# EAGLE board MultiBoard (EAGLE 9.2.2)

Size 158.42 x 80 mm. Coordinates in mm from the lower left corner, seen from the top.
Outline: 0,0 158.42,0 158.42,80 0,80 0,0
Copper layers (1*16): Top 0.035mm / dielectric 1.5mm / Bottom 0.035mm
Design rules "default": minimum track width 6mil, minimum drill 0.35mm, track to track 6mil, track to pad 6mil, pad to pad 6mil, via to via 6mil, smd to smd 6mil, copper to edge 40mil, drill to drill 6mil, minimum pad ring 10mil, minimum via ring 8mil, stop-mask expansion 4mil, vias tented up to drill 0mil, thermal gap 10mil
Net classes: 0 default: width 0.254 mm, clearance 0.254 mm; 2 gnd: width 0.305 mm, drill 0.559 mm, clearance 0.254 mm; 3 usbvcc: width 0.508 mm, drill 0.61 mm, clearance 0.254 mm; 4 aref: width 0.406 mm, drill 0.61 mm, clearance 0.254 mm

## Footprints (pad centres in the part's own frame; a part is rotated, then mirrored left to right if it is on the bottom)
C0805 = smd 1.3 x 1.5: 1 -0.95,0; 2 0.95,0
SOD-123_MINI-SMA = smd 1.5 x 2.1: A 1.8,0; C -1.8,0
SO08 = smd 0.66 x 2.032: 1 -1.905,-3.073; 2 -0.635,-3.073; 3 0.635,-3.073; 4 1.905,-3.073; 5 1.905,3.073; 6 0.635,3.073; 7 -0.635,3.073; 8 -1.905,3.073
M0805 = smd 1.3 x 1.6: 1 -0.95,0; 2 0.95,0
R0402 = smd 0.6 x 0.7: 1 -0.5,0; 2 0.5,0
FE05-1 = drill 0.813 long: 1 -5.08,0; 2 -2.54,0; 3 0,0; 4 2.54,0; 5 5.08,0
DIL28-3 = drill 0.85 pad 1.422 long: 1 -16.51,-3.81; 2 -13.97,-3.81; 3 -11.43,-3.81; 4 -8.89,-3.81; 5 -6.35,-3.81; 6 -3.81,-3.81; 7 -1.27,-3.81; 8 1.27,-3.81; 9 3.81,-3.81; 10 6.35,-3.81; 11 8.89,-3.81; 12 11.43,-3.81; 13 13.97,-3.81; 14 16.51,-3.81; 15 16.51,3.81; 16 13.97,3.81; 17 11.43,3.81; 18 8.89,3.81; 19 6.35,3.81; 20 3.81,3.81; 21 1.27,3.81; 22 -1.27,3.81; 23 -3.81,3.81; 24 -6.35,3.81; 25 -8.89,3.81; 26 -11.43,3.81; 27 -13.97,3.81; 28 -16.51,3.81

## Placement (x,y rotation side)
C_MAX485_1  [C0805]  -7.62,-57.15 0 top  (outside the outline)
C_MAX485_2  [C0805]  -7.62,-52.07 0 top  (outside the outline)
D1  CGRM4007-G  [SOD-123_MINI-SMA]  -5.08,-68.58 0 top  (outside the outline)
MAX485  MAX485CSA  [SO08]  -5.08,-12.7 0 top  (outside the outline)
R5  [M0805]  -7.62,-41.91 0 top  (outside the outline)
R6  [M0805]  -7.62,-46.99 0 top  (outside the outline)
R_MAX1  10K  [R0402]  -0.5,-132.08 0 top  (outside the outline)
R_MAX2  10K  [R0402]  -7.62,-138.43 0 top  (outside the outline)
R_MAX3  10K  [R0402]  -7.62,-143.51 0 top  (outside the outline)
R_MAX4  10K  [R0402]  -7.62,-148.59 0 top  (outside the outline)
R_MAX485  10K  [R0402]  -0.5,-81.28 0 top  (outside the outline)
R_MAX485_1  10K  [R0402]  -0.5,-93.98 0 top  (outside the outline)
R_MAX485_2  10K  [R0402]  -0.5,-106.68 0 top  (outside the outline)
R_MAX485_3  10K  [R0402]  -0.5,-119.38 0 top  (outside the outline)
SV1  [FE05-1]  8.89,-16.51 0 top  (outside the outline)
ZU4  ATMEGA328P-PU  [DIL28-3]  22.86,-6.35 0 top

## Library data of the parts
C_MAX485_1 C_MAX485_2 = rcl; SPICEPREFIX: C
D1 = diode
MAX485 = andereBauteile
R5 R6 R_MAX1-R_MAX4 R_MAX485 R_MAX485_1-R_MAX485_3 = rcl; SPICEPREFIX: R
SV1 = con-lsta; OC_FARNELL: unknown; OC_NEWARK: unknown
ZU4 = SmartPrj

## Nets
+5V: C_MAX485_1.1 C_MAX485_2.1 MAX485.8 R_MAX1.2 R_MAX2.2 R_MAX485.2 R_MAX485_1.2 R_MAX485_2.2 R_MAX485_3.2
AD0: ZU4.23
AD1: ZU4.24
AD2: ZU4.25
AD3: ZU4.26
AD4/SDA: ZU4.27
AD5/SCL: ZU4.28
AGND: ZU4.22
AVCC: ZU4.20
GND: C_MAX485_1.2 C_MAX485_2.2 D1.C MAX485.5 R_MAX3.1 ZU4.8
IO0: ZU4.2
IO1: ZU4.3
IO2: ZU4.4
IO3: ZU4.5
IO4: ZU4.6
IO5: ZU4.11
IO6: ZU4.12
IO7: ZU4.13
IO8: ZU4.14
IO9: ZU4.15
MISO: ZU4.18
MOSI: ZU4.17
N$1: MAX485.1 R_MAX485_3.1
N$2: MAX485.2 R_MAX485_2.1
N$3: MAX485.3 R_MAX485_1.1
N$4: MAX485.4 R_MAX485.1
N$5: MAX485.7 R_MAX2.1 R_MAX4.2
N$6: D1.A R_MAX1.1
N$7: MAX485.6 R_MAX3.2 R_MAX4.1
SCK: ZU4.19
SS: ZU4.16
VCC: ZU4.7

## Tracks (layer width: path | path; a pad name or v marks a point on that pad's centre or on a via)
+5V  (8 unrouted)
GND  (5 unrouted)
N$1  (1 unrouted)
N$2  (1 unrouted)
N$3  (1 unrouted)
N$4  (1 unrouted)
N$5  (2 unrouted)
N$6  (1 unrouted)
N$7  (2 unrouted)